# Altium PCB Webbie-V3.2.PcbDoc (part 1 of 3)
Units mil, origin at the board's own origin, x right, y up, seen from the top; angles counter-clockwise.
Board outline 3937.01 x 1574.8 mil, 4 copper layers (Top Layer, Layer 1, Layer 2, Bottom Layer), stack 61.865 mil thick; 123 components, 84 nets, 458 pads, 249 vias.
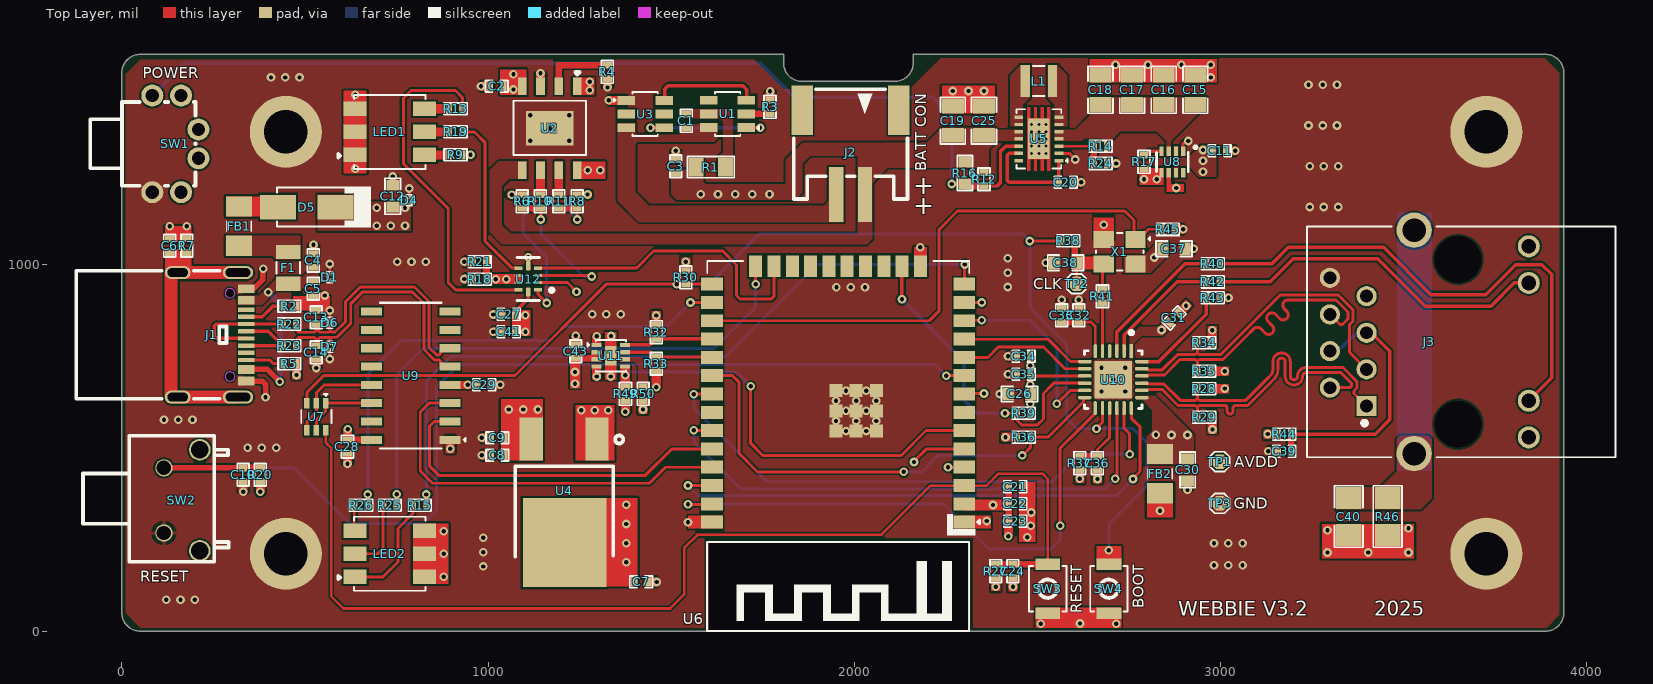
[diagram p0: Top Layer view]
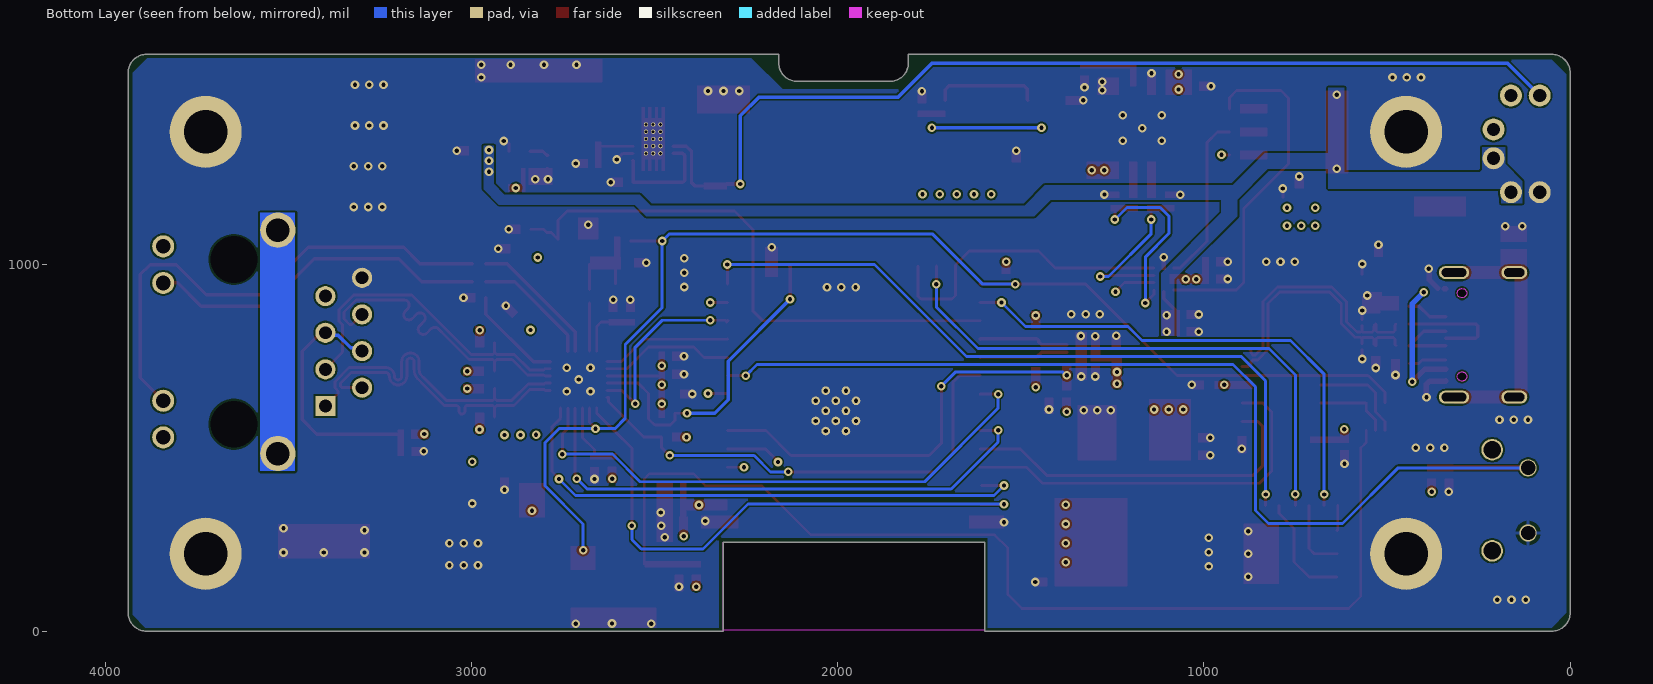
[diagram p1: Bottom Layer view, seen from below]
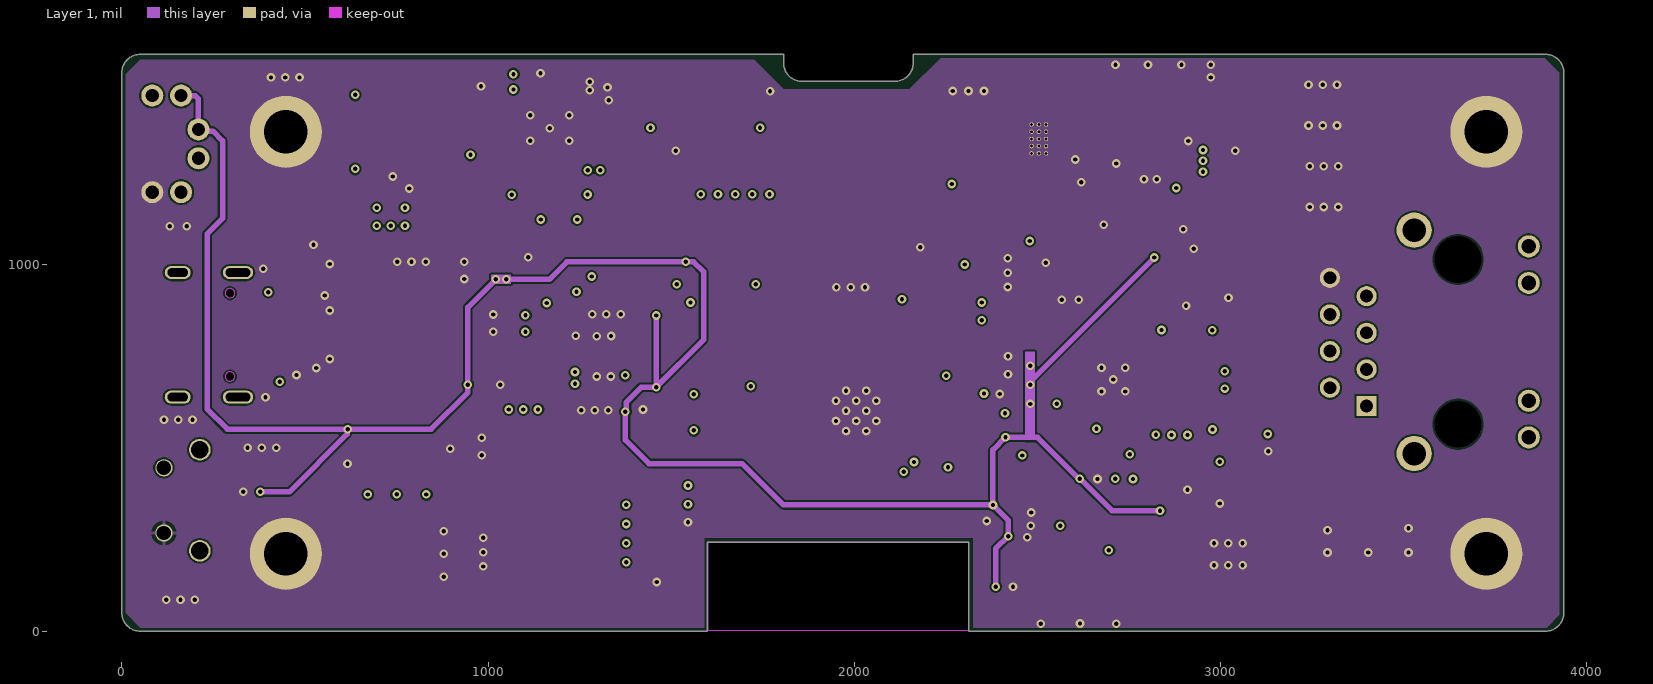
[diagram p2: Layer 1]
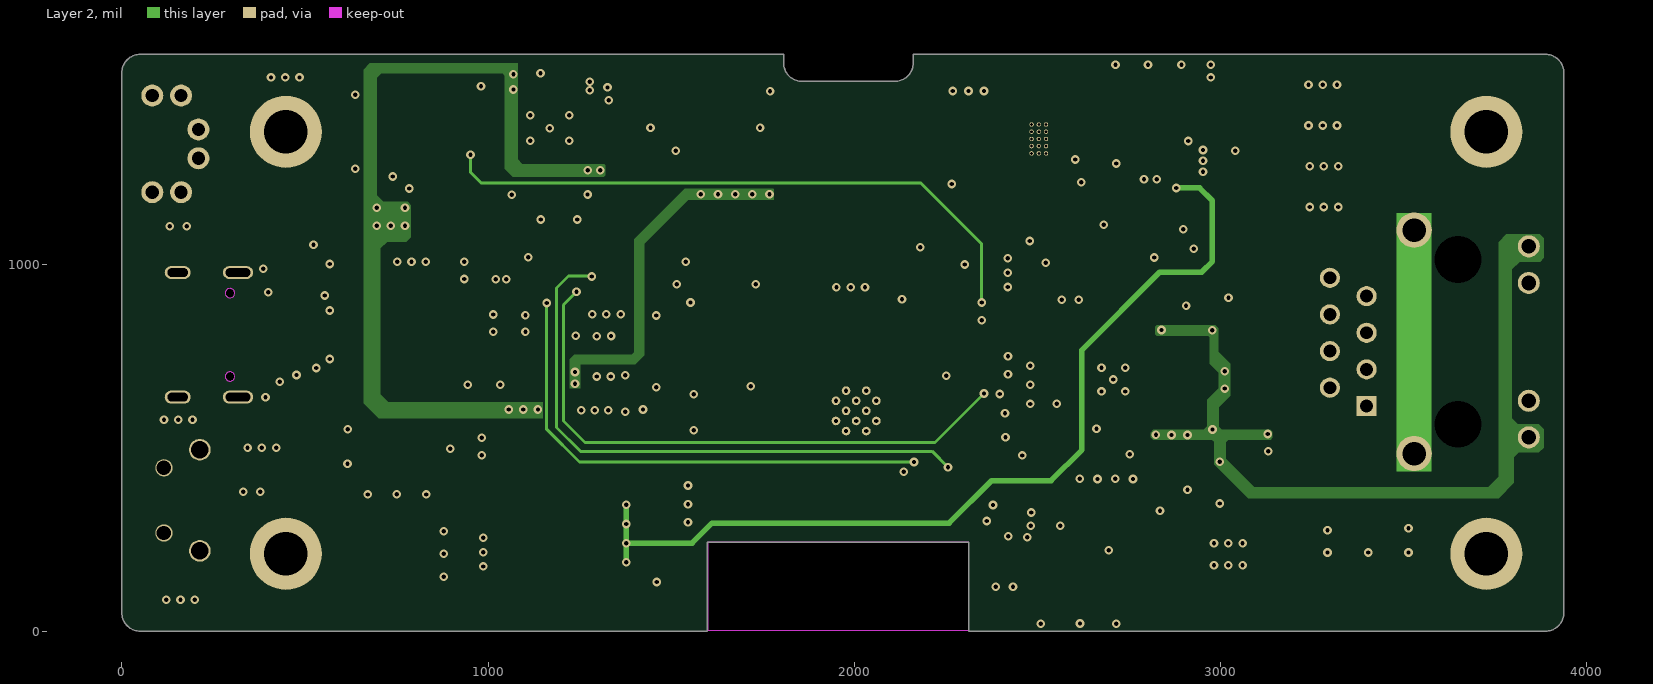
[diagram p3: Layer 2]
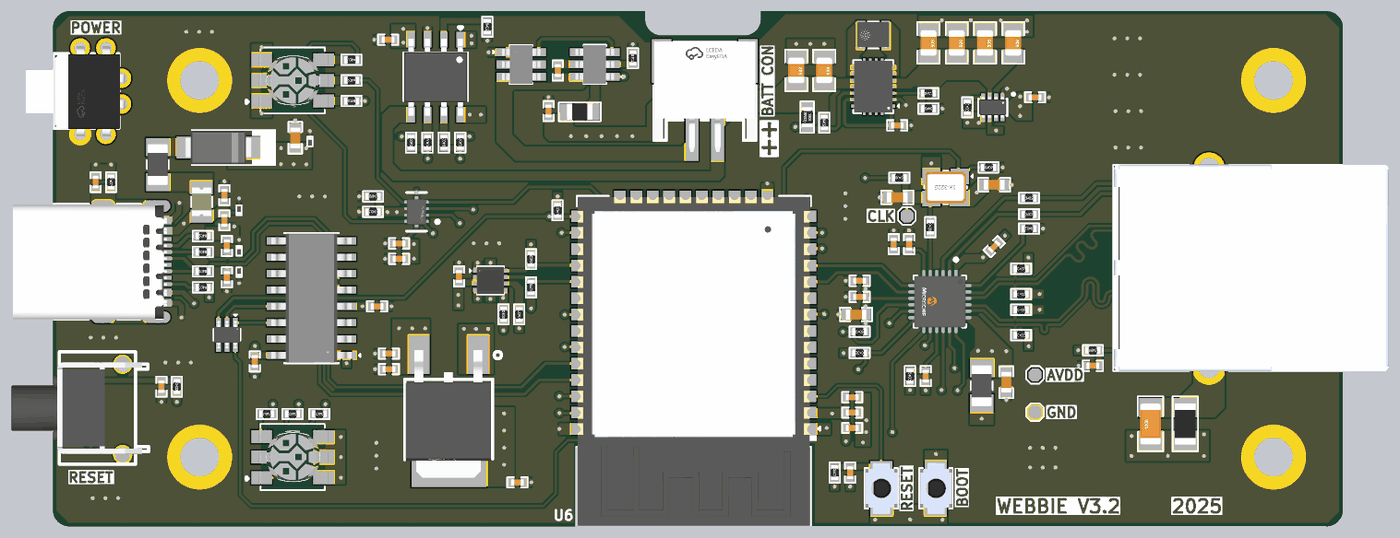
[diagram p5: 3D render of the assembled board from above, using the file's embedded part models]

## Layer stack, top to bottom
Top Solder: solder mask 0.787, Solder Resist, Dk 3.5
Top Layer: signal copper 1.378
Dielectric 2: prepreg 7.9921, PP-006, Dk 4.1
Layer 1: signal copper 0.598
Dielectric 1: dielectric 41.929, FR-4, Dk 4.8
Layer 2: signal copper 0.598
Dielectric 3: prepreg 7.9921, PP-006, Dk 4.1
Bottom Layer: signal copper 1.378
Bottom Solder: solder mask 0.787, Solder Resist, Dk 3.5

## Board outline
50,0 cw(c50,50) 0,50 0,1524.8 cw(c50,1524.8) 50,1574.8 1807.08,1574.8 cw(c1807.08,1574.78) 1807.1,1574.78 1807.1,1551 ccw(c1857.1,1551) 1857.1,1501 2110.39,1501 ccw(c2110.39,1551) 2160.39,1551 2160.39,1574.8 3817.37,1574.8 3887.01,1574.8 cw(c3887.01,1524.8) 3937.01,1524.8 3937.01,50 cw(c3887.01,50) 3887.01,0 3887.01,0.22 2311.67,0.22 2311.67,242.23 1597.76,242.23 1597.76,0

## Design rules (kind name [scope] priority, off if disabled: settings)
Clearance [All] p1: gap=5 ignorepadtopadclearanceinfootprint=TRUE except(0: Arc-Text Track-Text SMDPad-Text THPad-Text Via-Text Fill-Text Poly-Text Region-Text Text-Text Text-Hole; 7: Arc-Hole Track-Hole Via-Hole)
DiffPairsRouting [All] p1: maxlimit=10 minlimit=6 mostfreqgap=10 toplayer_maxgap=6 toplayer_prefgap=6 toplayer_minwidth=8 toplayer_maxwidth=8 toplayer_prefwidth=8 midlayer1_mingap=10 midlayer1_minwidth=15 midlayer1_maxwidth=15 midlayer1_prefwidth=15 midlayer2_mingap=10 midlayer2_minwidth=15 midlayer2_maxwidth=15 midlayer2_prefwidth=15 bottomlayer_maxgap=6 bottomlayer_prefgap=6 bottomlayer_minwidth=8 bottomlayer_maxwidth=8 bottomlayer_prefwidth=8 maxuncoupledlength=500
HoleSize [All] p1: absolutevalues=TRUE maxlimit=500 minlimit=1 maxpercent=80.000 minpercent=20.000
HoleToHoleClearance [All] p1: gap=7 allowstackedmicrovias=TRUE
MatchedLengths "Schematic Matched Net Lengths" [InNetClass('Ethernet')] p1: tolerance=20 checknetsindiffpair=FALSE checkdiffpairvsdiffpair=TRUE checkxsignals=TRUE checkothers=TRUE
MatchedLengths "Schematic Matched Net Lengths_2" [InNetClass('USB 90 OHM')] p2: tolerance=50 checknetsindiffpair=FALSE checkdiffpairvsdiffpair=TRUE checkxsignals=TRUE checkothers=TRUE
MaxMinImpedance "Schematic Impedance Constraint" [InNetClass('Ethernet')] p1: minimum=97.00 maximum=105.0
MaxMinImpedance "Schematic Impedance Constraint_2" [InNetClass('USB 90 OHM')] p2: minimum=85.00 maximum=95.00
MinimumSolderMaskSliver [All] p1: minsoldermaskwidth=0
PlaneClearance [All] p1: clearance=10
PlaneConnect [All] p1: planeconnectstyle=Direct reliefexpansion=20 reliefentries=4 reliefconductorwidth=10 reliefairgap=10
PolygonConnect [All] p1: connectstyle=Direct reliefconductorwidth=10 reliefentries=4 polygonreliefangle="90 Angle" airgapwidth=10
RoutingVias [All] p1: holewidth=11.81 width=23.62 viastyle="Through Hole" minholewidth=11.81 minwidth=23.62 maxholewidth=11.81 maxwidth=23.62
SilkToSilkClearance [All] p1: silktosilkclearance=0
SilkToSolderMaskClearance [IsPad] p1: minsilkscreentomaskgap=0 clearancetoexposedcopper=TRUE
SolderMaskExpansion [All] p1: expansion=4 istentingtop=FALSE
SupplyNets "Schematic Supply Nets_12" [InNet('+3V3_USB')] p1: voltage=0.000
SupplyNets "Schematic Supply Nets_11" [InNet('3.3V_ESP')] p2: voltage=0.000
SupplyNets "Schematic Supply Nets_10" [InNet('+3V3_BATT')] p3: voltage=0.000
SupplyNets "Schematic Supply Nets_8" [InNet('OR_3.3V')] p4: voltage=0.000
SupplyNets "Schematic Supply Nets_6" [InNet('+5V_OUT')] p5: voltage=0.000
SupplyNets "Schematic Supply Nets_5" [InNet('AVDD')] p6: voltage=0.000
SupplyNets "Schematic Supply Nets_4" [InNet('B-')] p7: voltage=0.000
SupplyNets "Schematic Supply Nets_3" [InNet('OUT/BATT+')] p8: voltage=0.000
SupplyNets "Schematic Supply Nets_2" [InNet('GND')] p9: voltage=0.000
SupplyNets "Schematic Supply Nets_1" [InNet('VUSB')] p10: voltage=0.000
UnRoutedNet [All] p1: checkbadconnections=TRUE
Width [All] p1: maxlimit=50 minlimit=5 preferedwidth=10
21 further rules are at their usual default settings.

## Classes and differential pairs
differential pair class Ethernet_Lines: RX TX
net class Ethernet: RX_N RX_P TX_N TX_P
differential pair class USB_Lines: USB
net class "USB 90 OHM": USB_N USB_P
component class Power_Sheet: C1 C2 C3 C4 C5 C6 C7 C8 C9 C11 C12 C13 C14 C15 C16 C17 C18 C19 C20 C25 C27 C41 D1 D4 D5 F1 FB1 J1 J2 L1 LED1 LED2 R1 R2 R3 R4 R5 R6 R7 R8 R9 R10 R11 R12 R13 R14 R15 R16 R17 R18 R19 R21 R22 R23 R24 R25 R26 SW1 U1 U2 U3 U4 U5 U8 U12
component class FuelGauge_Sheet: C43 R32 R33 R49 R50 U11
component class Ethernet_Sheet: C26 C30 C31 C32 C33 C34 C35 C36 C37 C38 C39 C40 FB2 J3 R28 R29 R34 R35 R36 R37 R38 R39 R40 R41 R42 R43 R44 R45 R46 TP1 TP2 TP3 U10 X1
component class Controller_Sheet: C10 C21 C22 C23 C24 C28 C29 D6 D7 R20 R27 R30 SW2 SW3 SW4 U6 U7 U9
differential pair USB: +USB_P -USB_N
differential pair TX: +TX_P -TX_N
differential pair RX: +RX_P -RX_N

## Components (designator, comment, footprint, x,y, rotation, side; value= is the part's Value field where it differs from the comment)
C1 "100nF" cap-0402 1541.17,1393.44 r270 top locked
C2 "100nF" cap-0402 1023.03,1487.85 r180 top
C3 "10uF" Cap-0402 1512.45,1269.61 r270 top
C4 "10nF" Cap-0402 523.08,1012.15 r90 top
C5 "10nF" Cap-0402 523.08,935.14 r270 top
C6 "4.7nF" Cap-0402 130.33,1052.46 r270 top
C7 "1uF" Cap-0402 1417.52,134.47 r180 top
C8 "1uF" Cap-0402 1025.46,480.49 r0 top
C9 "100nF" cap-0402 1025.38,528.01 r180 top
C10 "100nF" cap-0402 331.11,427 r270 top
C11 "1uF" Cap-0402 2997.51,1311.57 r180 top
C12 "10uF" Cap-0603 739.47,1187.55 r270 top
C13 "47pF" Cap-0402 530.83,857.28 r270 top
C14 "47pF" Cap-0402 530.83,760.96 r90 top
C15 "22uF" Cap-0805 2931,1478 r270 top
C16 "22uF" Cap-0805 2844.76,1478 r270 top
C17 "22uF" Cap-0805 2758.51,1478 r270 top
C18 "22uF" Cap-0805 2672.27,1478 r270 top
C19 "22uF" Cap-0805 2269,1394 r270 top
C20 "100nF" cap-0402 2577.03,1225.93 r0 top
C21 "10nF" Cap-0402 2439.5,394.63 r180 top
C22 "100nF" cap-0402 2439.5,347.62 r180 top
C23 "100nF" cap-0402 2439.5,300.61 r180 top
C24 "100nF" cap-0402 2433,164 r270 top
C25 "22uF" Cap-0805 2354.01,1394 r270 top
C26 "10uF" Cap-0603 2451.05,647.66 r0 top
C27 "1uF" Cap-0402 1056.34,864.84 r0 top
C28 "10nF" Cap-0402 616,504 r270 top
C29 "100nF" cap-0402 989.34,672.53 r0 top
C30 "10uF" Cap-0603 2909.78,440.62 r90 top
C31 "100nF" cap-0402 2872.57,855.49 r45 top
C32 "1uF" Cap-0402 2613,862.5 r270 top
C33 "4.7nF" Cap-0402 2565.99,862.49 r90 top
C34 "100nF" cap-0402 2462.01,750.63 r180 top
C35 "100nF" cap-0402 2462,701.55 r180 top
C36 "100nF" cap-0402 2663.76,459.05 r90 top
C37 "10uF" Cap-0603 2872.57,1044.26 r180 top
C38 "15pF" Cap-0603 2577.01,1005.75 r0 top
C39 "4.7nF" Cap-0402 3174,490.99 r0 top
C40 "4.7nF" Cap-1206 3349.99,313 r90 top
C41 "100nF" cap-0402 1056.35,817.83 r0 top
C43 "100nF" cap-0402 1239.33,763.96 r90 top
D1 "PESD5V0H1BSFYL" DSN0603-2 567.91,966.55 r90 top
D4 "PESD5V0H1BSFYL" DSN0603-2 784.33,1176.45 r270 top
D5 "SS34" SMA 505,1158.02 r180 top
D6 "PESD5V0H1BSFYL" DSN0603-2 568,842.28 r270 top
D7 "PESD5V0H1BSFYL" DSN0603-2 568,776.77 r90 top
F1 "BSMD0805L-200" Fuse-0805 454.02,991.9 r90 top
FB1 "100MHz" IND-1206 319.93,1106 r90 top
FB2 "100MHz" IND-1206 2834.57,429.9 r270 top
J1 "MC-121-L119" MC-121-L119 317.04,979.25 r270 top locked
J2 "S2B-PH-SM4-TB(LF)(SN)" S2B-PH-SM4-TB(LF)(SN) 1857.74,1422.32 r180 top locked
J3 "HR911105A" HR911105A 3570,790 r270 top locked
L1 "1uH" "IND-1008 (2520 Metric)" 2503.69,1502 r0 top
LED1 "MHP5050RGBDT" MHP5050RGBDT 731.46,1363.31 r0 top locked
LED2 "MHP5050RGBDT" MHP5050RGBDT 731.46,211.5 r0 top locked
R1 "100R" RES-0805 1608.02,1267 r180 top
R2 "5.1K" Res-0402 457.47,887.5 r180 top
R3 "1K" Res-0402 1769.89,1431.34 r270 top locked
R4 "1.2K" Res-0402 1325.82,1527.22 r270 top
R5 "5.1K" Res-0402 457.48,730.5 r180 top
R6 "10K" Res-0402 1093.01,1173.5 r90 top locked
R7 "1M" Res-0402 177.34,1052.46 r270 top
R8 "10K" Res-0402 1243.04,1173.5 r90 top locked
R9 "470R" Res-0402 910.99,1300.32 r180 top
R10 "0R" Res-0402 1142.94,1173.5 r90 top locked
R11 "0R" Res-0402 1193.04,1173.41 r90 top
R12 "0R" Res-0402 2354.01,1234 r270 top
R13 "470R" Res-0402 911,1426.3 r180 top
R14 "768k" Res-0402 2672.27,1324.09 r0 top
R15 "470R" Res-0402 812.95,343.5 r180 top
R16 "10K" Res-0603 2302,1251 r90 top value=10kR
R17 "10K" Res-0402 2790.86,1281.13 r270 top
R18 "10K" Res-0402 977,961.52 r180 top
R19 "470R" Res-0402 911,1363.31 r180 top
R20 "10K" Res-0402 378.12,426.99 r270 top
R21 "10K" Res-0402 976.99,1008.53 r180 top
R22 "27R" Res-0402 457.5,838.7 r180 top
R23 "27R" Res-0402 457.5,779.65 r180 top
R24 "137k" Res-0402 2672.27,1277 r180 top
R25 "470R" Res-0402 731.46,343.5 r180 top
R26 "470R" Res-0402 652.95,343.5 r180 top
R27 "10K" Res-0402 2386,164 r270 top
R28 "49.9R" Res-0402 2955,662.18 r0 top
R29 "49.9R" Res-0402 2954.99,584.53 r0 top
R30 "10K" Res-0402 1540,966 r90 top
R32 "10K" Res-0402 1459.25,816.79 r90 top
R33 "10K" Res-0402 1459.25,730.13 r270 top
R34 "49.9R" Res-0402 2954.99,787.49 r0 top
R35 "49.9R" Res-0402 2954.99,709.84 r0 top
R36 "1.5K" Res-0402 2462,529.91 r180 top
R37 "10K" Res-0402 2615.76,459.05 r270 top
R38 "33R" Res-0402 2583.51,1065.76 r180 top
R39 "10K" Res-0402 2462.01,595 r0 top
R40 "470R" Res-0402 2979.01,1003.79 r0 top
R41 "33R" Res-0402 2677.47,914.5 r270 top
R42 "470R" Res-0402 2979.01,953.8 r0 top
R43 "12.1k" Res-0402 2979,910.31 r180 top
R44 "0R" Res-0402 3174,538 r180 top
R45 "10K" Res-0402 2855.88,1097.35 r0 top
R46 "1M" Res-1206 3456,313 r90 top
R49 "10K" Res-0402 1375.23,647.99 r270 top
R50 "10K" Res-0402 1423.05,647.86 r90 top
SW1 "TK-6580A8-1" TK-6580A8-1 83,1198.66 r270 top locked
SW2 "1-1825027-4" 1-1825027-4 212.87,357.42 r270 top locked
SW3 "B3U-1000P" B3U-1000P 2528,116 r90 top
SW4 "B3U-1000P" B3U-1000P 2695,116 r90 top
TP1 "TEST POINT 0.5mm Dia" "Test-point - 0.5mm" 2997.51,462.97 r90 top
TP2 "TEST POINT 0.5mm Dia" "Test-point - 0.5mm" 2606.63,948.6 r90 top
TP3 "TEST POINT 0.5mm Dia" "Test-point - 0.5mm" 2997.51,348.8 r90 top
U1 "DW01-A/J" SOT-23-6 1653.63,1412.3 r180 top locked
U2 "TP4056-42-ESOP8" ESOP-8 1168.04,1373.35 r270 top locked
U3 "8205A" SOT-23-6 1429,1412 r0 top locked
U4 "UZ1085L-33-TN3-R" TO-252-2(DPAK) 1297.83,524.69 r270 top
U5 "TPS63020DSJR" "14-VSON (4x3)" 2503.69,1344.03 r180 top
U6 "ESP32-WROOM-32E-N4" "38-SMD Module" 1955.67,647.23 r180 top locked
U7 "UMH3N" SC-70-6_ 531.01,585.53 r270 top
U8 "LM66200DRLR" SOT8 2868.38,1281.13 r180 top
U9 "CH340C" SOP-16 789,697.53 r180 top
U10 "LAN8720A-CP-TR" LAN8720A-CP-TR 2707,687 r270 top
U11 "MAX17048G+T10" "8-TDFN-EP (2x2)" 1335.25,752 r0 top
U12 "TS3A24157RSER" UQFN-10(1.5x2) 1109.68,961.52 r180 top
X1 "50MHz" OT2EL4C4JI-111OLP-50M 2724.47,1036 r180 top

## Footprints (in the part's own frame and the unit in brackets; to place one, negate y for a bottom-side part, rotate by r counter-clockwise, add the part's x,y. Pads: shape width x height; smd on the part's side, far side on the other; paste and mask are expansions set on the pad)
1-1825027-4 [mm]
  round 1.2 hole 1 paste+0.135 mask+0.015: 1(-2.25,-2.49) 2(2.27,-2.49)
  round 1.5 hole 1.2 paste+0.169 mask+0.015: 3(-3.505,0) 4(3.505,0)
  silkscreen extent -4.47,-8.1 4.26,2.01, body extent -4.31,-8.64 4.1,1.51, height 7.02
"8-TDFN-EP (2x2)" [mm]
  rect 0.7x0.3 smd: 1(-0.99,0.75) 2(-0.99,0.25) 3(-0.99,-0.25) 4(-0.99,-0.75) 5(0.99,-0.75) 6(0.99,-0.25) 7(0.99,0.25) 8(0.99,0.75)
  rect 0.8x1.38 smd: 9(0,0)
  silkscreen extent -1.63,-1.1 1.05,1.1, body extent -1.05,-1.05 1.05,1.05, height 0.81
"14-VSON (4x3)" [mm]
  rect 0.6x0.24 smd: 1(-1.4,1.5) 2(-1.4,1) 3(-1.4,0.5) 4(-1.4,0) 5(-1.4,-0.5) 6(-1.4,-1) 7(-1.4,-1.5) 8(1.4,-1.5) 9(1.4,-1) 10(1.4,-0.5) 11(1.4,0) 12(1.4,0.5) 13(1.4,1) 14(1.4,1.5)
  round 0.3 hole 0.2: 15(-0.5,0.5) 15(-0.5,1) 15(-0.5,0) 15(-0.5,-1) 15(-0.5,-0.5) 15(0,1) 15(0,0.5) 15(0,0) 15(0,-0.5) 15(0,-1) 15(0.5,0.5) 15(0.5,1) 15(0.5,0) 15(0.5,-1) 15(0.5,-0.5)
  rect 1.5x2.8 smd: 15(0,0)
  Top Layer region: 0.79,-2.2 0.59,-2.2 0.59,-1.425 0.33,-1.425 0.33,-2.2 0.13,-2.2 0.13,-1.425 -0.13,-1.425 -0.13,-2.2 -0.33,-2.2 -0.33,-1.425 -0.59,-1.425 -0.59,-2.2 -0.79,-2.2 -0.79,2.2 -0.59,2.2 -0.59,1.425 -0.33,1.425 -0.33,2.2 -0.13,2.2 -0.13,1.425 0.13,1.425 0.13,2.2 0.33,2.2 0.33,1.425 0.59,1.425 0.59,2.2 0.79,2.2
  silkscreen extent -2.01,-2.06 1.55,2.06, body extent -1.5,-2 1.5,2, height 1
"38-SMD Module" [mm]
  rect 1.5x0.9 smd: 1(-8.75,8.88) 2(-8.75,7.61) 3(-8.75,6.34) 4(-8.75,5.07) 5(-8.75,3.8) 6(-8.75,2.53) 7(-8.75,1.26) 8(-8.75,-0.01) 9(-8.75,-1.28) 10(-8.75,-2.55) 11(-8.75,-3.82) 12(-8.75,-5.09) 13(-8.75,-6.36) 14(-8.75,-7.63) 25(8.75,-7.63) 26(8.75,-6.36) 27(8.75,-5.09) 28(8.75,-3.82) 29(8.75,-2.55) 30(8.75,-1.28) 31(8.75,-0.01) 32(8.75,1.26) 33(8.75,2.53) 34(8.75,3.8) 35(8.75,5.07) 36(8.75,6.34) 37(8.75,7.61) 38(8.75,8.88)
  rect 0.9x1.5 smd: 15(-5.71,-8.88) 16(-4.44,-8.88) 17(-3.17,-8.88) 18(-1.9,-8.88) 19(-0.63,-8.88) 20(0.64,-8.88) 21(1.91,-8.88) 22(3.18,-8.88) 23(4.45,-8.88) 24(5.72,-8.88)
  rect 0.9x0.9 smd: 39(-2.65,2.56) 40(-1.25,2.56) 41(0.15,2.56) 42(-2.65,1.16) 43(-1.25,1.16) 44(0.15,1.16) 45(-2.65,-0.24) 46(-1.25,-0.24) 47(0.15,-0.24)
  round 0.6 hole 0.3 mask+0: 39_10(-1.95,2.56) 39_11(-0.55,2.56) 39_12(-2.65,1.86) 39_13(-1.25,1.86) 39_14(0.15,1.86) 39_15(-1.95,1.16) 39_16(-0.55,1.16) 39_17(-2.65,0.46) 39_18(-1.25,0.46) 39_19(0.15,0.46) 39_20(-1.95,-0.24) 39_21(-0.55,-0.24)
  Keep-Out Layer region: -9.042,10.287 9.042,10.287 9.042,16.383 -9.042,16.383
  silkscreen extent -9.8,-9.22 9.09,16.43, body extent -9,-9.12 9,16.38, height 3.25
B3U-1000P [mm] "SWITCH TACTILE SPST-NO 0.05A 12V"
  rect 0.82x1.72 smd: 1(-1.7,0) 2(1.7,0)
  silkscreen extent -1.57,-1.3 1.57,1.3, body extent -2,-1.26 2,1.24, height 1.6
cap-0402 [mil]
  rect 18x25 smd mask+2.36: 1(-18.5,0) 2(18.5,0)
  silkscreen extent -31,-16 31,16, body extent -20,-10 20,10, height 19
Cap-0402 [mil]
  rect 18x25 smd mask+2.36: 1(-18.5,0) 2(18.5,0)
  silkscreen extent -31,-16 31,16, body extent -20,-10 20,10, height 19
Cap-0603 [mil]
  rect 30x35 smd mask+2.36: 1(-30,0) 2(30,0)
  silkscreen extent -49,-21 49,21, body extent -32,-16 31,16, height 34
Cap-0805 [mil] "SMD 0805"
  rect 40x60 smd mask+2.76: 1(-40,0) 2(40,0)
  silkscreen extent -64,-34 64,34, body extent -39,-25 39,25, height 30
Cap-1206 [mil] "SMD 1206"
  rect 60x70 smd: 1(-50,0) 2(50,0)
  silkscreen extent -84,-39 84,39, body extent -63,-31 63,32, height 39
DSN0603-2 [mm]
  rect 0.2x0.24 smd mask+0.055: 1(-0.2,0) 2(0.2,0)
  silkscreen extent -0.38,-0.2 0.38,0.2, body extent -0.3,-0.15 0.3,0.15, height 0.32
ESOP-8 [mm]
  rect 1.2x0.6 smd: 1(-2.909,1.905) 2(-2.909,0.635) 3(-2.909,-0.635) 4(-2.909,-1.905) 5(2.909,-1.905) 6(2.909,-0.635) 7(2.909,0.635) 8(2.909,1.905)
  rect 2.4x3.3 smd: 9(0,0)
  silkscreen extent -3.88,-2.51 1.85,2.51, body extent -3,-2.45 3,2.45, height 1.75
Fuse-0805 [mm]
  rect 1x1.7 smd: 1(-1.1,0) 2(1.1,0)
  silkscreen extent -0.41,-0.81 0.41,0.81, body extent -1.1,-0.75 1.1,0.75, height 1.24
HR911105A [mm]
  rect 1.398x1.398 hole 0.89: 1(4.45,-4.355)
  round 1.398 hole 0.89: 2(3.18,-6.895) 3(1.91,-4.355) 4(0.64,-6.895) 5(-0.63,-4.355) 6(-1.9,-6.895) 7(-3.17,-4.355) 8(-4.44,-6.895)
  round 1.53 hole 1.02: 9(6.625,6.895) 10(4.085,6.895) 11(-4.085,6.895) 12(-6.625,6.895)
  round 0 hole 3.25 unplated: MH1(-5.715,1.995) MH2(5.715,1.995)
  round 2.445 hole 1.63: "Shield 1"(-7.745,-1.055) "Shield 2"(7.745,-1.055)
  silkscreen extent -8,-8.48 8,12.92, body extent -8.02,-8.42 8.02,12.88, height 13.5
"IND-1008 (2520 Metric)" [mm]
  rect 0.65x2.2 smd: 1(-0.95,0) 2(0.95,0)
  silkscreen extent -0.41,-1.04 0.41,1.04, body extent -1.25,-1 1.25,1, height 1.2
IND-1206 [mm]
  rect 1.4x1.82 smd: 1(-1.36,0) 2(1.36,0)
  silkscreen extent -0.34,-0.85 0.34,0.85, body extent -1.6,-0.8 1.6,0.8, height 1.3
LAN8720A-CP-TR [mm]
  rect 0.961x0.239 smd paste+0 mask+0: 1(-1.976,1.25)
  rrect100% 0.961x0.239 smd paste+0 mask+0: 2(-1.976,0.75) 3(-1.976,0.25) 4(-1.976,-0.25) 5(-1.976,-0.75) 6(-1.976,-1.25) 13(1.976,-1.25) 14(1.976,-0.75) 15(1.976,-0.25) 16(1.976,0.25) 17(1.976,0.75) 18(1.976,1.25)
  rrect100% 0.239x0.961 smd paste+0 mask+0: 7(-1.25,-1.976) 8(-0.75,-1.976) 9(-0.25,-1.976) 10(0.25,-1.976) 11(0.75,-1.976) 12(1.25,-1.976) 19(1.25,1.976) 20(0.75,1.976) 21(0.25,1.976) 22(-0.25,1.976) 23(-0.75,1.976) 24(-1.25,1.976)
  rect 2.6x2.6 smd paste-1000 mask+0: 25(0,0)
  silkscreen extent -3.38,-2 2,2, body extent -2.96,-2.96 2.96,2.96, height 0.25
MC-121-L119 [mm]
  round 0.7 hole 0.7 paste+0.079 mask+0.015: 7(1.43,-0.56) 8(7.21,-0.56)
  oval 0.9x2.1 hole 0.6 slot 1.7 at 90 deg: 13(0,0) 13(8.64,0)
  oval 0.9x1.8 hole 0.6 slot 1.4 at 90 deg: 13(0,-4.18) 13(8.64,-4.18)
  rect 0.6x1.15 smd paste-100 mask+0.051: A1B12(1.12,0.565) A4B9(1.92,0.565) B1A12(7.52,0.565) B4A9(6.72,0.565)
  rect 0.3x1.15 smd paste-100 mask+0.051: A5(3.07,0.565) A6(4.07,0.565) A7(4.57,0.565) A8(5.57,0.565) B5(6.07,0.565) B6(5.07,0.565) B7(3.57,0.565) B8(2.57,0.565)
  Keep-Out Layer circle w0.005: c7.21,-0.56 r0.325
  Keep-Out Layer circle w0.005: c1.43,-0.56 r0.325
  silkscreen extent -0.13,-11.21 8.76,-0.79, body extent -0.13,-11.15 8.81,0.8, height 3.27
MHP5050RGBDT [mm]
  rect 1.6x1 smd: 1(-2.4,-1.6) 2(2.4,-1.6) 3(-2.4,0) 4(2.4,0) 5(-2.4,1.6) 6(2.4,1.6)
  silkscreen extent -3.58,-2.57 2.49,2.57, body extent -2.66,-2.5 2.74,2.5, height 1.62
OT2EL4C4JI-111OLP-50M [mm]
  rect 1.4x1.2 smd: 1(-1.1,-0.85) 2(1.1,-0.85) 3(1.1,0.85) 4(-1.1,0.85)
  silkscreen extent -2.11,-1.3 1.65,1.3, body extent -1.6,-1.25 1.6,1.25, height 0.81
Res-0402 [mil]
  rect 18x25 smd mask+2.17: 1(-18.5,0) 2(18.5,0)
  silkscreen extent -32,-17 32,16, body extent -23,-11 23,11, height 16
Res-0603 [mil]
  rect 30x35 smd: 1(-30,0) 2(30,0)
  silkscreen extent -48,-21 48,21, body extent -31,-17 31,17, height 18
RES-0805 [mil] "SMD 0805"
  rect 40x50 smd: 1(-40,0) 2(40,0)
  silkscreen extent -64,-29 64,29, body extent -39,-25 39,24, height 24
Res-1206 [mil]
  rect 60x70 smd: 1(-50,0) 2(50,0)
  silkscreen extent -84,-39 84,39, body extent -63,-31 63,31, height 24
S2B-PH-SM4-TB(LF)(SN) [mm]
  rect 1x3.8 smd: 1(-4.35,5.85) 2(-2.35,5.85)
  rect 1.5x3.4 smd: 3(0,0) 4(-6.7,0)
  silkscreen extent -7.3,-1.45 0.6,6.15, body extent -7.3,-1.54 0.6,7.06, height 5.51
SC-70-6_ [mm]
  rect 0.73x0.38 smd: 1(-0.95,0.65) 2(-0.95,0) 3(-0.95,-0.65) 4(0.95,-0.65) 5(0.95,0) 6(0.95,0.65)
  silkscreen extent -1.57,-1.04 0.46,1.04, body extent -1.05,-1 1.05,1, height 0.92
SMA [mm]
  rect 2.5x1.7 smd: 1(-2,0) 2(2,0)
  silkscreen extent -4.45,-1.42 2.06,1.42, body extent -2.6,-1.3 2.6,1.3, height 2.4
SOP-16 [mil]
  rect 57.55x22 smd: 1(-107.27,175) 2(-107.27,125) 3(-107.27,75) 4(-107.27,25) 5(-107.27,-25) 6(-107.27,-75) 7(-107.27,-125) 8(-107.27,-175) 9(107.27,-175) 10(107.27,-125) 11(107.27,-75) 12(107.27,-25) 13(107.27,25) 14(107.27,75) 15(107.27,125) 16(107.27,175)
  silkscreen extent -149,-199 84,199, body extent -122,-197 122,197, height 69
SOT8 [mm]
  rect 0.3x0.67 smd mask-2539.97: 1(-0.75,-0.74) 2(-0.25,-0.74) 3(0.25,-0.74) 4(0.75,-0.74) 5(0.75,0.74) 6(0.25,0.74) 7(-0.25,0.74) 8(-0.75,0.74)
  silkscreen extent -1.7,-1.12 1.1,0.65, body extent -1.05,-0.8 1.05,0.8, height 0.6
SOT-23-6 [mm]
  rect 1.22x0.62 smd: 1(-1.31,0.95) 2(-1.31,0) 3(-1.31,-0.95) 4(1.31,-0.95) 5(1.31,0) 6(1.31,0.95)
  silkscreen extent -2.18,-1.52 0.86,1.52, body extent -1.5,-1.5 1.5,1.5, height 1.47
"Test-point - 0.5mm" [mm]
  oct 1x1 smd: 1(0,0)
  silkscreen extent -0.68,-0.68 0.68,0.68
TK-6580A8-1 [mil]
  round 60 hole 36: 1(0,0) 2(0,78.74) 3(-263.78,0) 4(-263.78,78.74) 5(-92.52,125.98) 6(-171.26,125.98)
  silkscreen extent -246,-169 -18,118, body extent -269,-167 7,139, height 229
TO-252-2(DPAK) [mil]
  rect 118.1x63 smd: 1(0,0) 3(0,-180)
  rect 244.09x228.35 smd: 2(282.68,-89)
  silkscreen extent -10,-224 321,71, body extent -14,-221 377,39, height 91
UQFN-10(1.5x2) [mm]
  rrect40% 0.55x0.25 smd paste+0 mask+0: 1(-0.675,0.75) 4(-0.675,-0.75) 6(0.675,-0.75) 9(0.675,0.75)
  rrect50% 0.55x0.2 smd paste+0 mask+0: 2(-0.675,0.25) 3(-0.675,-0.25) 7(0.675,-0.25) 8(0.675,0.25)
  rrect33% 0.3x0.6 smd paste+0 mask+0: 5(0,-0.9) 10(0,0.9)
  silkscreen extent -1.75,-1.5 0.77,1.5, body extent -1.05,-1.3 1.05,1.3, height 0.25

## Part data
C1 C2 C9 C10 C20 C22 C23 C24 C29 C31 C34 C35 C36 C41 C43: library part C1005X7R1H104KT000F, "CAP CER 0.1UF 50V X7R 0402", Dielectric=X7R, LCSC Part Number=C361198, Manufacturer=TDK, Tolerance=10%, Voltage=25V, Category="Ceramic Capacitors", ComponentLink1Description=LCSC, ComponentLink1URL=https://www.lcsc.com/product-detail/Multilayer-Ceramic-Capacitors-MLCC-SMD-SMT_TDK-C1005X7R1H104KT000F_C361198.html, Item Type=Capacitor, Manufacturer Part Number=C1005X7R1H104KT000F, RoHS=No, Supplier 1=Avnet, Supplier Part Number 1=C1005X7R1H104KT000F
C3: library part CL05A106MP5NUNC, "CAP CER 10UF 10V X5R 0402", Case Code (Imperial)=0402, Case Code (Metric)=1005, Dielectric=X5R, LCSC Part Number=C315248, Manufacturer=Samsung, Max Operating Temperature=85°C, Min Operating Temperature=-55°C, Package Quantity=1, Tolerance=20%, Voltage Rating=10V, Capacitance=10uF, Case/Package=0402, Category="Ceramic Capacitors", ComponentLink1Description=https://datasheet.ciiva.com/25721/cl05a106mp5nunc-25721584.pdf?src-supplier=Digi-Key, ComponentLink1URL=https://datasheet.ciiva.com/25721/cl05a106mp5nunc-25721584.pdf?src-supplier=Digi-Key, ComponentLink2Description=https://datasheet.ciiva.com/26838/getdatasheetpartid-745310-26838170.pdf?src-supplier=Verical, ComponentLink2URL=https://datasheet.ciiva.com/26838/getdatasheetpartid-745310-26838170.pdf?src-supplier=Verical, Construction=Flat, Contact Plating=Tin, Depth=0.5mm, Item Type=Capacitor, Lead Free="Lead Free", Length=1mm, Manufacturer Part Number=CL05A106MP5NUNC, Mount="Surface Mount", Packaging="Tape and Reel", Pricing 1="10000=0.02537 (USD)", Radiation Hardening=No, RoHS=Yes, RoHS Compliant=Yes, Series=CL, Stock 1=1729850, Supplier 1=Avnet, Supplier Part Number 1=CL05A106MP5NUNC, Termination=Wraparound, Thickness=0.028inch, Width=0.02inch
C4 C5 C21 C28: library part CC0402KRX7R8BB103, "CAP CER 10000PF 25V X7R 0402", Case Code (Imperial)=0402, Case Code (Metric)=1005, Dielectric=X7R, LCSC Part Number=C327025, Manufacturer=Yageo, Max Operating Temperature=125°C, Min Operating Temperature=-55°C, Package Quantity=1, Supplier Part Number 1=311-1337-1-ND, Tolerance=10%, Voltage Rating=25V, Capacitance=10nF, Case/Package=0402, ComponentLink1Description=http://www.yageo.com/documents/recent/UPY-GPHC_X7R_6.3V-to-50V_18.pdf?src-supplier=Digi-Key, ComponentLink1URL=http://www.yageo.com/documents/recent/UPY-GPHC_X7R_6.3V-to-50V_18.pdf?src-supplier=Digi-Key, ComponentLink2Description=https://www.verical.com/server-webapp/html/getDatasheet?partID=375418&src-supplier=Verical, ComponentLink2URL=https://www.verical.com/server-webapp/html/getDatasheet?partID=375418&src-supplier=Verical, ComponentLink3Description=http://www.yageo.com/documents/recent/UPY-GPHC_X7R_6.3V-to-50V_8.pdf?src-supplier=Avnet, ComponentLink3URL=http://www.yageo.com/documents/recent/UPY-GPHC_X7R_6.3V-to-50V_8.pdf?src-supplier=Avnet, ComponentLink4Description=https://4donline.ihs.com/images/VipMasterIC/IC/YAGO/YAGO-S-A0003557223/YAGO-S-A0003557223-1.pdf?hkey=52A5661711E402568146F3353EA87419&src-supplier=Element14, ComponentLink4URL=https://4donline.ihs.com/images/VipMasterIC/IC/YAGO/YAGO-S-A0003557223/YAGO-S-A0003557223-1.pdf?hkey=52A5661711E402568146F3353EA87419&src-supplier=Element14, ComponentLink5Description=http://www.farnell.com/datasheets/2167236.pdf?src-supplier=Element14, ComponentLink5URL=http://www.farnell.com/datasheets/2167236.pdf?src-supplier=Element14, ComponentLink6Description=http://www.mouser.com/ds/2/447/Yageo_UPY-GP_NP0_16V-to-50V_9-358835.pdf?src-supplier=Mouser, ComponentLink6URL=http://www.mouser.com/ds/2/447/Yageo_UPY-GP_NP0_16V-to-50V_9-358835.pdf?src-supplier=Mouser, Composition=Ceramic, Depth=0.5mm, Halogen Free="Halogen Free", Height=0.5mm, Item Type=Capacitor, Lead Free="Lead Free", Length=1mm, Manufacturer Part Number=CC0402KRX7R8BB103, Mount="Surface Mount", Packaging="Tape and Reel", Pricing 1="1=0.1, 10=0.021, 100=0.0093, 500=0.00666, 1000=0.00523, 2500=0.00476, 5000=0.00438 (USD)", Radiation Hardening=No, REACH SVHC=Unknown, Stock 1=0, Supplier 1=Digi-Key, Termination=SMD/SMT, Thickness=0.022inch, Voltage Rating (DC)=25V, Width=0.02inch
C6 C33 C39: library part CC0402KRX7R9BB472, "CAP CER 4700PF 50V X7R 0402", Case Code (Imperial)=0402, Case Code (Metric)=1005, Dielectric=X7R, LCSC Part Number=C106208, Manufacturer=Yageo, Max Operating Temperature=125°C, Min Operating Temperature=-55°C, Package Quantity=1, Supplier Part Number 1=1989300, Temperature Coefficient=30ppm/°C, Tolerance=10%, Voltage Rating=50V, Capacitance=4.7nF, Case/Package=0402, Category="Ceramic Capacitors", ComponentLink1Description=https://datasheet.ciiva.com/7978/1489800-7978108.pdf?src-supplier=Element14, ComponentLink1URL=https://datasheet.ciiva.com/7978/1489800-7978108.pdf?src-supplier=Element14, ComponentLink2Description=https://datasheet.ciiva.com/176/mlccorderingcode-176364.pdf?src-supplier=Digikey, ComponentLink2URL=https://datasheet.ciiva.com/176/mlccorderingcode-176364.pdf?src-supplier=Digikey, ComponentLink3Description=https://datasheet.ciiva.com/176/mlccorderingcode-176363.pdf?src-supplier=Digikey, ComponentLink3URL=https://datasheet.ciiva.com/176/mlccorderingcode-176363.pdf?src-supplier=Digikey, ComponentLink4Description=https://datasheet.ciiva.com/176/mlccorderingcode-176365.pdf?src-supplier=Digikey, ComponentLink4URL=https://datasheet.ciiva.com/176/mlccorderingcode-176365.pdf?src-supplier=Digikey, ComponentLink5Description=https://datasheet.ciiva.com/11586/upy-gphc-x7r-6-3v-to-50v-8-11586491.pdf?src-supplier=Avnet, ComponentLink5URL=https://datasheet.ciiva.com/11586/upy-gphc-x7r-6-3v-to-50v-8-11586491.pdf?src-supplier=Avnet, Construction=Flat, Depth=0.5mm, Halogen Free=5694HalogenFree, Height=0.5mm, Item Type=Capacitor, Lead Free=5697LeadFree, Length=1mm, Manufacturer Part Number=CC0402KRX7R9BB472, Material=4241ConductorMaterial, Mount="Surface Mount", Number of Pins=2NUMBER, Packaging="Tape and Reel", Pricing 1="10000=0.0021, 40000=0.002, 150000=0.0019, 400000=0.0018, 1000000=0.0017 (USD)", Radiation Hardening=No, Reach SVHC Compliant=No, RoHS=Yes, RoHS Compliant=Yes, Series=CC, Stock 1=1780000, Supplier 1="Future Electronics", Termination=SMD/SMT, Thickness=0.022inch, Voltage Rating (DC)=50V, Width=0.02inch
C7: library part CC0402KRX5R6BB105, "CAP CER 1UF 10V X5R 0402", Case Code (Imperial)=0402, Case Code (Metric)=1005, Dielectric=X5R, LCSC Part Number=C106254, Manufacturer=Yageo, Max Operating Temperature=85°C, Min Operating Temperature=-55°C, Package Quantity=1, Resistor Type=Ceramic, Supplier Part Number 1=603-CC402KRX5R6BB105, Tolerance=10%, Voltage Rating=10V, Capacitance=1uF, Case/Package=0402, Category="Ceramic Capacitors", ComponentLink1Description=https://datasheet.ciiva.com/176/upy-gphc-x5r-4v-to-50v-12-176704.pdf?src-supplier=Digi-Key, ComponentLink1URL=https://datasheet.ciiva.com/176/upy-gphc-x5r-4v-to-50v-12-176704.pdf?src-supplier=Digi-Key, ComponentLink2Description=https://datasheet.ciiva.com/176/mlccorderingcode-176705.pdf?src-supplier=Digi-Key, ComponentLink2URL=https://datasheet.ciiva.com/176/mlccorderingcode-176705.pdf?src-supplier=Digi-Key, ComponentLink3Description=https://datasheet.ciiva.com/176/mlccorderingcode-176706.pdf?src-supplier=Digi-Key, ComponentLink3URL=https://datasheet.ciiva.com/176/mlccorderingcode-176706.pdf?src-supplier=Digi-Key, Construction=Flat, Depth=0.5mm, Dissipation Factor=15%, Halogen Free="Halogen Free", Height=0.5mm, Item Type=Capacitor, Lead Free="Lead Free", Length=1mm, Manufacturer Part Number=CC0402KRX5R6BB105, Mount="Surface Mount", Number of Pins=2, Packaging="Tape and Reel", Pricing 1="1=0.11000, 10=0.05500, 50=0.05500, 100=0.03300, 500=0.02700, 1000=0.02200, 2500=0.02100, 10000=0.01800 (USD)", Radiation Hardening=No, REACH SVHC="No SVHC", RoHS=Yes, RoHS Compliant=Yes, Series=CC, Stock 1=6711367, Supplier 1=Mouser, Termination=SMD/SMT, Thickness=0.022inch, Voltage Rating (DC)=10V, Width=0.02inch
C8 C11 C27: library part CC0402KRX5R8BB105, "CAP CER 1UF 25V X5R 0402", Case Code (Imperial)=0402, Case Code (Metric)=1005, Dielectric=X5R, LCSC Part Number=C326568, Manufacturer=Yageo, Max Operating Temperature=85°C, Min Operating Temperature=-55°C, Package Quantity=10000, Supplier Part Number 1=603-CC402KRX5R8BB105, Tolerance=10%, Voltage Rating=25V, Capacitance=1uF, Case/Package=0402, Category="Ceramic Capacitors", ComponentLink1Description=http://www.mouser.com/ds/2/447/Yageo_UPY-GP_NP0_16V-to-50V_9-358835.pdf?src-supplier=Mouser, ComponentLink1URL=http://www.mouser.com/ds/2/447/Yageo_UPY-GP_NP0_16V-to-50V_9-358835.pdf?src-supplier=Mouser, ComponentLink2Description=http://www.yageo.com/documents/recent/UPY-GPHC_X5R_4V-to-50V_25.pdf?src-supplier=Digi-Key, ComponentLink2URL=http://www.yageo.com/documents/recent/UPY-GPHC_X5R_4V-to-50V_25.pdf?src-supplier=Digi-Key, ComponentLink3Description=https://4donline.ihs.com/images/VipMasterIC/IC/YAGO/YAGO-S-A0006851646/YAGO-S-A0006851646-1.pdf?hkey=6D3A4C79FDBF58556ACFDE234799DDF0&src-supplier=Newark, ComponentLink3URL=https://4donline.ihs.com/images/VipMasterIC/IC/YAGO/YAGO-S-A0006851646/YAGO-S-A0006851646-1.pdf?hkey=6D3A4C79FDBF58556ACFDE234799DDF0&src-supplier=Newark, Halogen Free="Halogen Free", Lead Free="Lead Free", Length=0.039inch, Manufacturer Part Number=CC0402KRX5R8BB105, Mount="Surface Mount", Packaging="Tape and Reel", Pricing 1="1=0.30000, 10=0.20400, 50=0.20400, 100=0.11600, 1000=0.07200, 10000=0.05900 (USD)", RoHS=Yes, RoHS Compliant=Yes, Stock 1=91975, Supplier 1=Mouser, Termination=SMD/SMT, Thickness=0.022inch, Voltage Rating (DC)=25V, Weight=2.3E-05oz, Width=0.02inch
C12 C26 C30 C37: library part CL10A106MA8NRNC, "CAP CER 10UF 25V X5R 0603", Case Code (Imperial)=0603, Case Code (Metric)=1608, Dielectric=X5R, LCSC Part Number=C96446, Manufacturer=Samsung, Max Operating Temperature=85°C, Min Operating Temperature=-55°C, Package Quantity=1, Tolerance=20%, Voltage Rating=25V, Capacitance=10uF, Case/Package=0603, Category="Ceramic Capacitors", ComponentLink1Description=https://datasheet.ciiva.com/25766/cl10a106ma8nrnc-25766562.pdf?src-supplier=Digi-Key, ComponentLink1URL=https://datasheet.ciiva.com/25766/cl10a106ma8nrnc-25766562.pdf?src-supplier=Digi-Key, Construction=Flat, Contact Plating=Tin, Lead Free="Lead Free", Length=0.063inch, Manufacturer Part Number=CL10A106MA8NRNC, Mount="Surface Mount", Packaging="Tape and Reel", Pricing 1="4000=0.03753, 8000=0.03700, 16000=0.03595, 24000=0.03515, 32000=0.03383, 40000=0.03304, 400000=0.03225 (USD)", RoHS=Yes, RoHS Compliant=Yes, Series=CL, Supplier 1=Avnet, Supplier Part Number 1=CL10A106MA8NRNC, Termination=Wraparound, Thickness=0.035inch, Width=0.031inch
C13 C14: library part GCM1555C1H470FA16D, "CAP CER 47PF 50V C0G/NP0 0402", Case Code (Imperial)=0402, Case Code (Metric)=1005, LCSC Part Number=C393684, Manufacturer=Murata, Max Operating Temperature=125°C, Min Operating Temperature=-55°C, Ratings=AEC-Q200, Supplier Part Number 1=490-16445-1-ND, Tolerance=1%, Voltage Rating=50V, Capacitance=47pF, Case/Package=0402, Category="Ceramic Capacitors", ComponentLink1Description=http://search.murata.co.jp/Ceramy/image/img/A01X/G101/ENG/GCM1555C1H470FA16-01.pdf?src-supplier=Digi-Key, ComponentLink1URL=http://search.murata.co.jp/Ceramy/image/img/A01X/G101/ENG/GCM1555C1H470FA16-01.pdf?src-supplier=Digi-Key, Manufacturer Part Number=GCM1555C1H470FA16D, Mount="Surface Mount", Packaging="Tape and Reel", Pricing 1="1=0.11000, 10=0.07900, 50=0.04500, 100=0.03730, 500=0.02618, 1000=0.02168, 2500=0.02018, 5000=0.01846 (USD)", RoHS=No, Stock 1=27098, Supplier 1=Digi-Key
C15 C16 C17 C18 C19 C25: library part C2012X5R1V226MT000E, "CAP CER 22UF 35V X5R 0805", LCSC Part Number=C338080, Manufacturer="TDK Corporation", Package=0805, ComponentLink1Description=LCSC, ComponentLink1URL=https://www.lcsc.com/product-detail/Multilayer-Ceramic-Capacitors-MLCC-SMD-SMT_TDK-C2012X5R1V226M125AC_C2179409.html, Item Type=Capacitor, Manufacturer Part Number=C2012X5R1V226MT000E
C32: library part CC0402KRX5R7BB105, "CAP CER 1UF 16V X5R 0402", Case Code (Imperial)=0402, Case Code (Metric)=1005, Dielectric=X5R, LCSC Part Number=C325464, Manufacturer=Yageo, Max Operating Temperature=85°C, Min Operating Temperature=-55°C, Supplier Part Number 1=311-1691-6-ND, Tolerance=10%, Voltage Rating=16V, Capacitance=1uF, Case/Package=0402, ComponentLink1Description=http://www.yageo.com/documents/recent/UPY-GPHC_X5R_4V-to-50V_12.pdf?src-supplier=Avnet+Europe, ComponentLink1URL=http://www.yageo.com/documents/recent/UPY-GPHC_X5R_4V-to-50V_12.pdf?src-supplier=Avnet+Europe, Composition=Ceramic, Depth=0.5mm, Halogen Free="Halogen Free", Height=0.5mm, Item Type=Capacitor, Lead Free="Lead Free", Length=1mm, Manufacturer Part Number=CC0402KRX5R7BB105, Mount="Surface Mount", Packaging="Tape and Reel", Pricing 1="1=0.36, 10=0.252, 100=0.1512, 500=0.1134, 1000=0.09576, 2500=0.09072, 5000=0.08568 (USD)", Radiation Hardening=No, Stock 1=1405667, Supplier 1=Digi-Key, Termination=SMD/SMT, Thickness=0.022inch, Voltage Rating (DC)=16V, Weight=2.3E-05oz, Width=0.02inch
C38: library part CC0603JRNPO9BN150, "CAP CER 15PF 50V C0G/NPO 0603", Case Code (Imperial)=0603, Case Code (Metric)=1608, Dielectric=C0G, Dielectric Material=Ceramic, Insulation Resistance=100GR, LCSC Part Number=C107037, Manufacturer=Yageo, Max Operating Temperature=125°C, Min Operating Temperature=-55°C, Package Quantity=1, Supplier Part Number 1=4234670, Tolerance=5%, Voltage Rating=50V, Case/Package=0603, Category="Ceramic Capacitors", ComponentLink1Description=https://datasheet.ciiva.com/144/mlccorderingcode-144635.pdf?src-supplier=Digi-Key, ComponentLink1URL=https://datasheet.ciiva.com/144/mlccorderingcode-144635.pdf?src-supplier=Digi-Key, ComponentLink2Description=https://datasheet.ciiva.com/144/mlccorderingcode-144636.pdf?src-supplier=Digi-Key, ComponentLink2URL=https://datasheet.ciiva.com/144/mlccorderingcode-144636.pdf?src-supplier=Digi-Key, ComponentLink3Description=https://datasheet.ciiva.com/8033/1443161-8033721.pdf?src-supplier=Element14, ComponentLink3URL=https://datasheet.ciiva.com/8033/1443161-8033721.pdf?src-supplier=Element14, ComponentLink4Description=https://datasheet.ciiva.com/28450/1443161-28450472.pdf?src-supplier=Element14, ComponentLink4URL=https://datasheet.ciiva.com/28450/1443161-28450472.pdf?src-supplier=Element14, ComponentLink5Description=https://datasheet.ciiva.com/144/mlccorderingcode-144634.pdf?src-supplier=Digi-Key, ComponentLink5URL=https://datasheet.ciiva.com/144/mlccorderingcode-144634.pdf?src-supplier=Digi-Key, ComponentLink6Description=https://datasheet.ciiva.com/8033/1734582-8033723.pdf?src-supplier=Element14, ComponentLink6URL=https://datasheet.ciiva.com/8033/1734582-8033723.pdf?src-supplier=Element14, ComponentLink7Description=https://datasheet.ciiva.com/8033/1734582-8033722.pdf?src-supplier=Element14, ComponentLink7URL=https://datasheet.ciiva.com/8033/1734582-8033722.pdf?src-supplier=Element14, ComponentLink8Description=https://datasheet.ciiva.com/11464/upy-gp-np0-16v-to-50v-8-11464727.pdf?src-supplier=Avnet, ComponentLink8URL=https://datasheet.ciiva.com/11464/upy-gp-np0-16v-to-50v-8-11464727.pdf?src-supplier=Avnet, Depth=0.8mm, Height=0.8mm, Item Type=Capacitor, Lead Free="Lead Free", Length=1.6mm, Manufacturer Part Number=CC0603JRNPO9BN150, Mounting Technology="Surface Mount", Packaging="Tape and Reel", Pins=2, Pricing 1="4000=0.0038, 16000=0.0036, 80000=0.0034, 160000=0.0033, 500000=0.0031 (USD)", Radiation Hardening=No, Reach SVHC Compliant=No, RoHS=Yes, RoHS Compliant=Yes, Series=CC, Stock 1=832000, Supplier 1="Future Electronics", Termination=SMD/SMT, Thickness=0.035inch, Width=0.031inch
C40: library part CC1206KKX7RCBB472, "CAP CER 4700PF 1KV X7R 1206", Case Code (Imperial)=1206, Case Code (Metric)=3216, Dielectric=X7R, Dielectric Material=Ceramic, LCSC Part Number=C107198, Manufacturer=Yageo, Max Operating Temperature=125°C, Min Operating Temperature=-55°C, Supplier Part Number 1=7130131, Tolerance=10%, Voltage Rating=1kV, Capacitance=4.7nF, Case/Package=1206, Category="Ceramic Capacitors", ComponentLink1Description=https://datasheet.ciiva.com/13208/upy-gp-np0-16v-to-50v-8-13208693.pdf?src-supplier=Mouser, ComponentLink1URL=https://datasheet.ciiva.com/13208/upy-gp-np0-16v-to-50v-8-13208693.pdf?src-supplier=Mouser, ComponentLink2Description=https://datasheet.ciiva.com/11466/hv-11466701.pdf?src-supplier=Avnet, ComponentLink2URL=https://datasheet.ciiva.com/11466/hv-11466701.pdf?src-supplier=Avnet, Depth=1.6mm, Item Type=Capacitor, Lead Free="Lead Free", Length=3.2mm, Manufacturer Part Number=CC1206KKX7RCBB472, Mount="Surface Mount", Number of Pins=2, Packaging="Tape and Reel", Pricing 1="3000=0.02860, 9000=0.02750, 15000=0.02700, 45000=0.02600, 75000=0.02510 (USD)", Radiation Hardening=No, Resistor Type=Ceramic, RoHS=Yes, RoHS Compliant=Yes, Series=CC, Stock 1=180000, Supplier 1="Future Electronics", Termination=SMD/SMT, Thickness=0.057inch, Voltage Rating (DC)=1kV, Weight=0.000571oz, Width=0.063inch
D1 D4 D6 D7: "TVS DIODE 5VWM 6.3VC DSN0603-2", LCSC Part Number=C477989, Manufacturer=Nexperia, Category="ESD and Circuit Protection ICs", ComponentLink1Description=http://www.farnell.com/datasheets/1961312.pdf?src-supplier=Farnell, ComponentLink1URL=http://www.farnell.com/datasheets/1961312.pdf?src-supplier=Farnell, ComponentLink2Description=https://assets.nexperia.com/documents/data-sheet/PESD5V0H1BSF.pdf?src-supplier=Digi-Key, ComponentLink2URL=https://assets.nexperia.com/documents/data-sheet/PESD5V0H1BSF.pdf?src-supplier=Digi-Key, ComponentLink3Description=http://www.farnell.com/datasheets/1961312.pdf?src-supplier=Newark, ComponentLink3URL=http://www.farnell.com/datasheets/1961312.pdf?src-supplier=Newark, Item Type=Diode, Manufacturer Part Number=PESD5V0H1BSFYL, Pricing 1="18000=0.06453, 36000=0.06278, 54000=0.06104, 90000=0.05930, 180000=0.05755, 900000=0.05581, 1800000=0.05406 (USD)", RoHS=Yes, RoHS Compliant=Yes, Stock 1=9000, Supplier 1=Avnet, Supplier Part Number 1=PESD5V0H1BSFYL
D5: "0.5mA@40V 40V Single 3A 0.55V@3A SMA(DO-214AC) Schottky Barrier Diodes (SBD) ROHS", LCSC Part Number=C8678, Manufacturer=MDD, Package=SMA(DO-214AC), ComponentLink1Description=LCSC, ComponentLink1URL=https://www.lcsc.com/product-detail/Schottky-Barrier-Diodes-SBD_MDD-Microdiode-Electronics-SS34_C8678.html, Item Type=Diode, Manufacturer Part Number=SS34
F1: "6V 2A 50A 1W -40℃~+85℃ 4A 4mΩ 5s 45mΩ 0805 Resettable Fuses ROHS", LCSC Part Number=C2757931, Manufacturer=BHFUSE, Package=0805, ComponentLink1Description=LCSC, ComponentLink1URL=https://www.lcsc.com/product-detail/Resettable-Fuses_BHFUSE-BSMD0805L-200_C2757931.html, Item Type=Fuse, Manufacturer Part Number=BSMD0805L-200
FB1 FB2: library part BLM31PG121SN1L, "FERRITE BEAD 120 OHM 1206 1LN", Case Code (Imperial)=1206, Case Code (Metric)=3216, Current Rating=3.5A, DC Current=3A, DC Resistance (DCR)=20mR, LCSC Part Number=C85841, Manufacturer=Murata, Max Operating Temperature=125°C, Min Operating Temperature=-55°C, Package Quantity=3000, Tolerance=25%, Case/Package=1206, Category="Ferrite Beads and Chips", ComponentLink1Description=https://datasheet.ciiva.com/19460/1845419-19460234.pdf?src-supplier=Jameco, ComponentLink1URL=https://datasheet.ciiva.com/19460/1845419-19460234.pdf?src-supplier=Jameco, ComponentLink2Description=https://datasheet.ciiva.com/1012/l0132s0193blm31p-1012992.pdf?src-supplier=Digi-Key, ComponentLink2URL=https://datasheet.ciiva.com/1012/l0132s0193blm31p-1012992.pdf?src-supplier=Digi-Key, ComponentLink3Description=https://datasheet.ciiva.com/11799/0900766b811b5866-11799444.pdf?src-supplier=RSComponents, ComponentLink3URL=https://datasheet.ciiva.com/11799/0900766b811b5866-11799444.pdf?src-supplier=RSComponents, ComponentLink4Description=https://datasheet.ciiva.com/3081/l0110s0100blm31p-3081665.pdf?src-supplier=Avnet, ComponentLink4URL=https://datasheet.ciiva.com/3081/l0110s0100blm31p-3081665.pdf?src-supplier=Avnet, ComponentLink5Description=https://datasheet.ciiva.com/41449/001172383-da-01-en-drossel-1206-120r-3-2x1-60mm-3000st-41449554.pdf?src-supplier=Conrad, ComponentLink5URL=https://datasheet.ciiva.com/41449/001172383-da-01-en-drossel-1206-120r-3-2x1-60mm-3000st-41449554.pdf?src-supplier=Conrad, ComponentLink6Description=https://datasheet.ciiva.com/29348/442557-da-01-en-chip-drossel-1206-120r-3000ma-3-2x1-60mm-29348014.pdf?src-supplier=Conrad, ComponentLink6URL=https://datasheet.ciiva.com/29348/442557-da-01-en-chip-drossel-1206-120r-3000ma-3-2x1-60mm-29348014.pdf?src-supplier=Conrad, ComponentLink7Description=https://datasheet.ciiva.com/14122/apblm31p-data-e-14122856.pdf?src-supplier=Distrelec, ComponentLink7URL=https://datasheet.ciiva.com/14122/apblm31p-data-e-14122856.pdf?src-supplier=Distrelec, ComponentLink8Description=https://datasheet.ciiva.com/48436/blm31pg121sn1l-eng-tds-48436731.pdf?src-supplier=Distrelec, ComponentLink8URL=https://datasheet.ciiva.com/48436/blm31pg121sn1l-eng-tds-48436731.pdf?src-supplier=Distrelec, ComponentLink9Description=https://datasheet.ciiva.com/1012/l0110s0100blm31p-1012991.pdf?src-supplier=Digi-Key, ComponentLink9URL=https://datasheet.ciiva.com/1012/l0110s0100blm31p-1012991.pdf?src-supplier=Digi-Key, ComponentLink10Description=https://datasheet.ciiva.com/1012/l0110s0100blm31p-1012993.pdf?src-supplier=Digi-Key, ComponentLink10URL=https://datasheet.ciiva.com/1012/l0110s0100blm31p-1012993.pdf?src-supplier=Digi-Key, ComponentLink11Description=https://datasheet.ciiva.com/3081/l0110s0100blm31p-3081666.pdf?src-supplier=Avnet, ComponentLink11URL=https://datasheet.ciiva.com/3081/l0110s0100blm31p-3081666.pdf?src-supplier=Avnet, ComponentLink12Description=https://datasheet.ciiva.com/16390/l0110s0100blm31p-16390857.pdf?src-supplier=Future+Electronics, ComponentLink12URL=https://datasheet.ciiva.com/16390/l0110s0100blm31p-16390857.pdf?src-supplier=Future+Electronics, ComponentLink13Description=https://datasheet.ciiva.com/18093/getdatasheetpartid-152966-18093084.pdf?src-supplier=Verical, ComponentLink13URL=https://datasheet.ciiva.com/18093/getdatasheetpartid-152966-18093084.pdf?src-supplier=Verical, Contact Plating=Tin,Matte, Core Material=Ferrite, Depth=1.6mm, Frequency=100MHz, Height=1.1mm, Impedance=120R, Item Type="Ferrite Bead", Lead Free="Lead Free", Length=3.2mm, Manufacturer Part Number=BLM31PG121SN1L, Material=Steel,Ferrite, Max Current Rating=3.5A, Max DC Current=3A, Military Standard=Not, Number of Lines=1, Number of Pins=2, Packaging="Tape and Reel", Pricing 1="3000=0.11563, 6000=0.10938, 12000=0.10313, 18000=0.09688, 24000=0.09063, 30000=0.08438, 300000=0.07813 (USD)", Radiation Hardening=No, RoHS=Yes, RoHS Compliant=Yes, Shielding=Unshielded, Stock 1=290640, Supplier 1=Avnet, Supplier Part Number 1=BLM31PG121SN1L, Termination=SMD/SMT, Test Frequency=100MHz, Width=1.6mm
J1: "5A USB 3.1 1 Surface Mount 16P Female -40℃~+85℃ Type-C SMD USB Connectors ROHS", LCSC Part Number=C6332278, Manufacturer="Hanbo Electronic", Package=SMD, ComponentLink1Description="LCSC Link", ComponentLink1URL=https://www.lcsc.com/product-detail/USB-Connectors_Hanbo-Electronic-MC-121-L119_C6332278.html?s_z=n_USB, Item Type=SMD, Manufacturer Part Number=MC-121-L119
J2: "1x2P 2P PH Tin 2 -25℃~+85℃ 2A 1 2mm Copper alloy Horizontal attachment SMD,P=2mm,Surface Mount，Right Angle Wire To Board Connector ROHS", LCSC Part Number=C295747, Manufacturer=JST, Package=SMD, ComponentLink1Description="LCSC Link", ComponentLink1URL=https://www.lcsc.com/product-detail/Wire-To-Board-Connector_JST-S2B-PH-SM4-TB-LF-SN_C295747.html, Item Type="JST Connector", Manufacturer Part Number=S2B-PH-SM4-TB(LF)(SN)
J3: "RJ45 RJReceptacle 1 WithLED Plugin Ethernet Connectors/Modular Connectors (RJ45 RJ11) ROHS", LCSC Part Number=C12074, Manufacturer=HANRUN, Package=Plugin, ComponentLink1Description=LCSC, ComponentLink1URL=https://www.lcsc.com/product-detail/Ethernet-Connectors-Modular-Connectors-RJ45-RJ11_HANRUN-Zhongshan-HanRun-Elec-HR911105A_C12074.html, Item Type="RJ45 Connector", Manufacturer Part Number=HR911105A
L1: library part DFE252012P-1R0M=P2, "FIXED IND 1UH 3.2A 0.042OHM SMD", Case Code (Imperial)=1008, Case Code (Metric)=2520, Current Rating=4.3A, DC Resistance (DCR)=42mR, Inductance Tolerance=20%, LCSC Part Number=C882955, Manufacturer=Murata, Manufacturer Part Number=DFE252012P-1R0M=P2, Max DC Current=3.2A, Max Operating Temperature=125°C, Min Operating Temperature=-40°C, Test Frequency=1MHz, Case/Package=1008, ComponentLink1Description=http://www.farnell.com/datasheets/2550134.pdf?src-supplier=Farnell, ComponentLink1URL=http://www.farnell.com/datasheets/2550134.pdf?src-supplier=Farnell, ComponentLink2Description=https://www.murata.com/~/media/webrenewal/products/inductor/chip/tokoproducts/wirewoundmetalalloychiptype/m_dfe252012p.ashx?src-supplier=Digikey, ComponentLink2URL=https://www.murata.com/~/media/webrenewal/products/inductor/chip/tokoproducts/wirewoundmetalalloychiptype/m_dfe252012p.ashx?src-supplier=Digikey, ComponentLink3Description=http://www.murata.com/~/media/webrenewal/products/inductor/chip/tokoproducts/wirewoundmetalalloychiptype/m_dfe252012p.ashx?src-supplier=Digikey, ComponentLink3URL=http://www.murata.com/~/media/webrenewal/products/inductor/chip/tokoproducts/wirewoundmetalalloychiptype/m_dfe252012p.ashx?src-supplier=Digikey, ComponentLink4Description=http://www.toko.co.jp/products/pdf/inductors/dfe252012p.pdf?src-supplier=Avnet, ComponentLink4URL=http://www.toko.co.jp/products/pdf/inductors/dfe252012p.pdf?src-supplier=Avnet, Core Material=Ferrite, Depth=2mm, ESR=42mR, Height=1.2mm, Height - Seated (Max)=0.039inch, Item Type=Inductor, Length=0.098inch, Mounting Technology="Surface Mount", Packaging="Cut Tape", Pricing="3000=0.103, 6000=0.1, 9000=0.0987, 12000=0.0976, 15000=0.0942 (USD)", RMS Current (Irms)=3.2A, RoHS=Yes, RoHS Compliant=Yes, Saturation Current=4.3A, Series=DFE252012P, Shielding=Shielded, Stock=30000, Supplier="Future Electronics", Tolerance=20%, Width=0.079inch
LED1 LED2: "20mA White Diffused -40℃~+85℃ RGB SMD5050 Light Emitting Diodes (LED) ROHS", LCSC Part Number=C409780, Manufacturer=MEIHUA, Package=SMD5050, ComponentLink1Description=LCSC, ComponentLink1URL=https://www.lcsc.com/product-detail/Light-Emitting-Diodes-LED_MEIHUA-MHP5050RGBDT_C409780.html, Item Type="RGB LED", Manufacturer Part Number=MHP5050RGBDT
R1: library part AC0805FR-07100RL, "RES SMD 100 OHM 1% 1/8W 0805", LCSC Part Number=C138274, Manufacturer=Yageo, Supplier Part Number=6087312, Category="Chip SMD Resistors", ComponentLink1Description=https://datasheet.ciiva.com/12656/pyu-ac-51-rohs-l-2-12656967.pdf?src-supplier=Mouser, ComponentLink1URL=https://datasheet.ciiva.com/12656/pyu-ac-51-rohs-l-2-12656967.pdf?src-supplier=Mouser, Item Type=Resistor, Manufacturer Part Number=AC0805FR-07100RL, Pricing="5000=0.0032, 25000=0.003, 125000=0.0028, 375000=0.0027, 1000000=0.0025 (USD)", RoHS=Yes, Stock=70000, Supplier="Future Electronics"